# Altium PCB attenuator-pcb - 6.PcbDoc
Units mm, origin at the board's own origin, x right, y up, seen from the top; angles counter-clockwise.
Board outline 18 x 38.59 mm, 2 copper layers (Top Layer, Bottom Layer), stack 1.56 mm thick; 9 components, 37 nets, 24 pads, 30 vias.
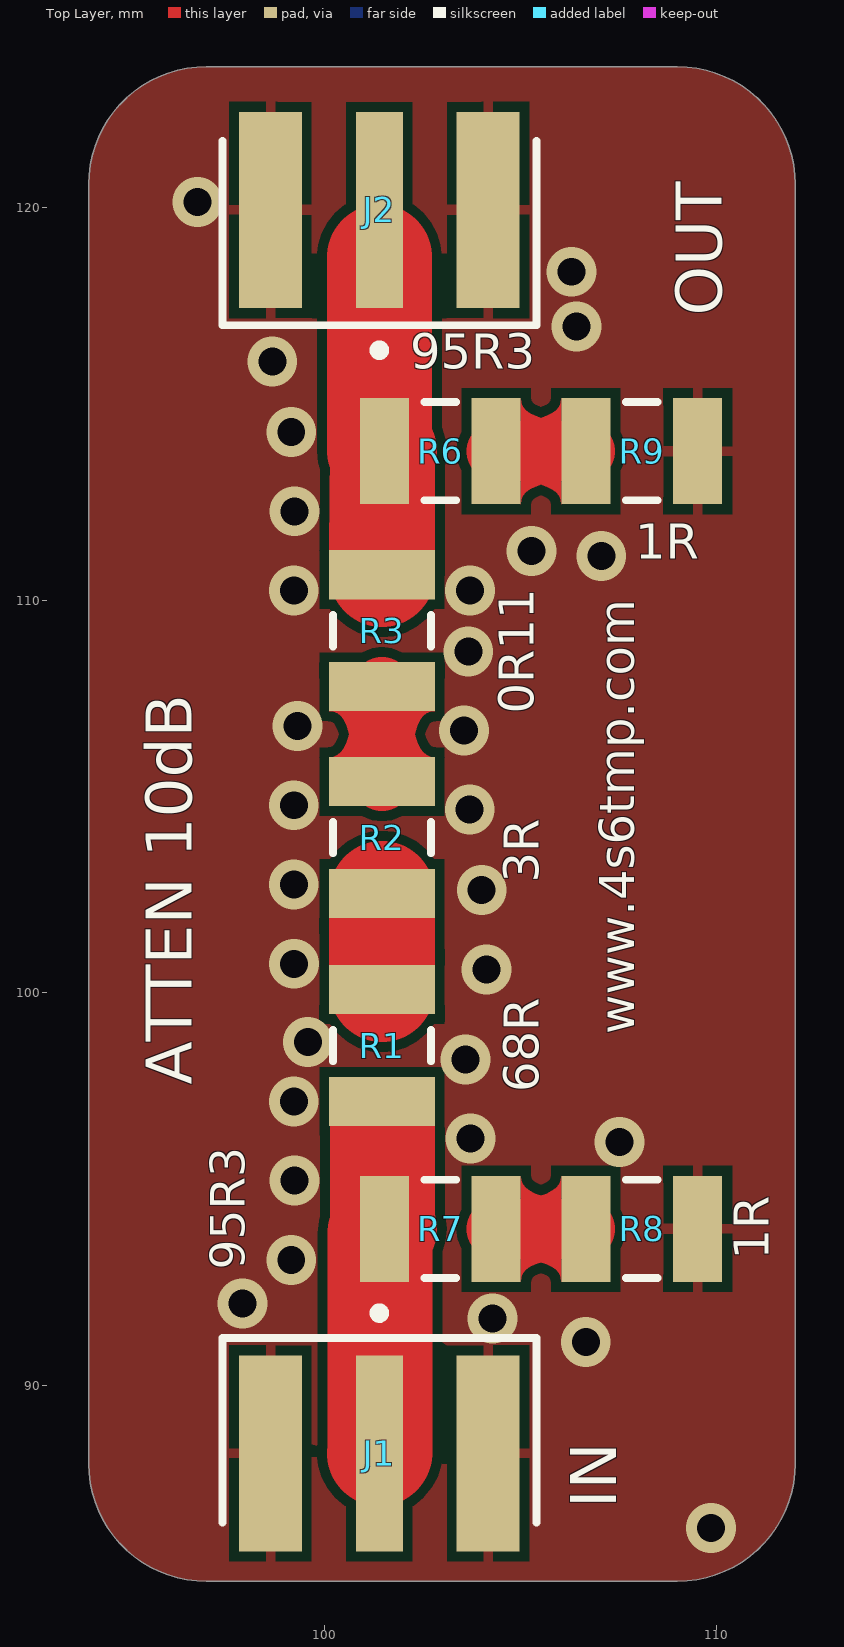
[diagram p0: Top Layer view]
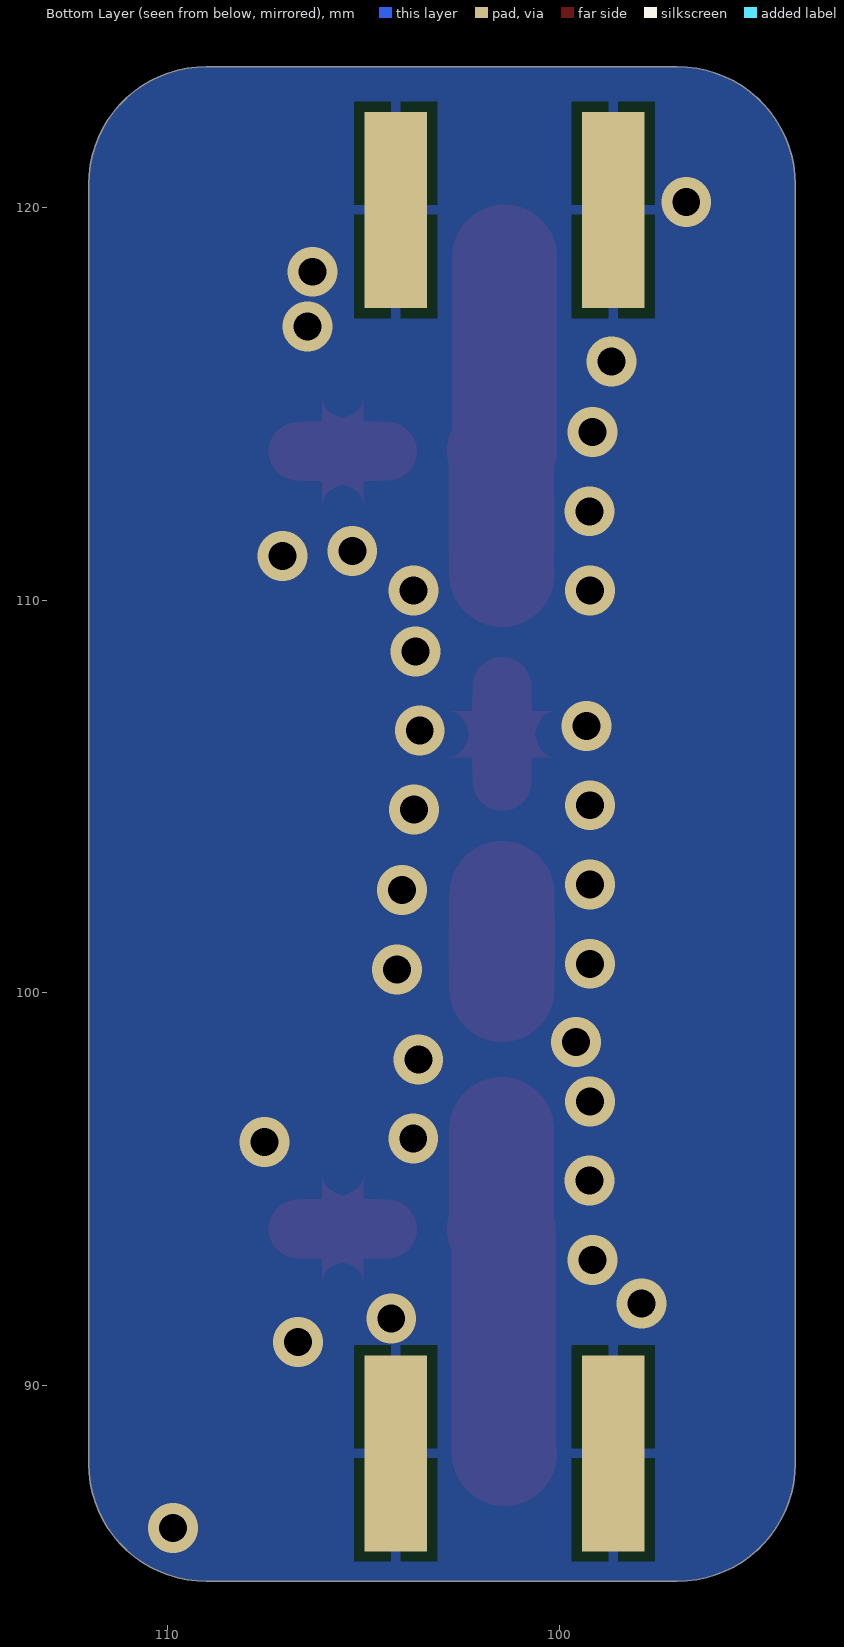
[diagram p1: Bottom Layer view, seen from below]

## Layer stack, top to bottom
Top Solder: solder mask 0.0203, Solder Resist, Dk 3.8
Top Layer: signal copper 0.035
Prepreg 7628: dielectric 1.49, FR-4, Dk 4.6
Bottom Layer: signal copper 0.035
Bottom Solder: solder mask 0.0203, Solder Resist, Dk 3.8

## Board outline
94,88 ccw(c97,88) 97,85 109,85 ccw(c109,88) 112,88 112,120.59 ccw(c109,120.59) 109,123.59 97,123.59 ccw(c97,120.59) 94,120.59

## Design rules (kind name [scope] priority, off if disabled: settings)
Clearance [All] p1: gap=0.254 ignorepadtopadclearanceinfootprint=FALSE except(0: Arc-Hole Track-Hole SMDPad-Hole THPad-Hole Via-Hole Fill-Hole Poly-Hole Region-Hole Text-Hole)
HoleToHoleClearance [All] p1: gap=0.1 allowstackedmicrovias=TRUE
MinimumSolderMaskSliver [All] p1 off: minsoldermaskwidth=0.1
PolygonConnect [All] p1: connectstyle=Relief reliefconductorwidth=0.254 reliefentries=4 polygonreliefangle="90 Angle" airgapwidth=0.254
RoomDefinition schematic [InComponentClass('schematic')] p1: confinementstyle=ConfineIn formatcopy=TRUE lockcomponents=FALSE outline 92.837,72.644 113.792,72.644 113.792,135.128 92.837,135.128
RoutingVias [All] p1: holewidth=0.711 width=1.27 viastyle="Through Hole" minholewidth=0.711 minwidth=1.27 maxholewidth=0.711 maxwidth=1.27
SolderMaskExpansion [All] p1: expansion=0.102 istentingtop=FALSE
Width [All] p1: maxlimit=3 minlimit=1.5 preferedwidth=2.673 substack1={BF15FDF8-BCB5-42EA-97F3-8AC8FC273260} impedanceprofiledriven=TRUE impedanceprofileid={88FF0C83-8680-40BB-AEE6-F79FA2882ED4} impedanceprofilevalue=50.000000 minimp=50.000000 maximp=50.000000 favimp=50.000000
Width Width_1 [All] p2: maxlimit=2 minlimit=0.254 preferedwidth=1 minimp=50.000000 maximp=50.000000 favimp=50.000000
28 further rules are at their usual default settings.

## Components (designator, comment, footprint, x,y, rotation, side; value= is the part's Value field where it differs from the comment)
J1 "IN" FP-CON-SMA-EDGE-S-MFG 101.405,81 r180 top
J2 "OUT" FP-CON-SMA-EDGE-S-MFG 101.405,127.2 r0 top
R1 "68R" RESC3225X70X50NL20T20 101.473,98.651 r90 top
R2 "3R" RESC3225X70X50NL20T20 101.473,103.95 r90 top
R3 "0R11" RESC3225X70X50NL20T20 101.473,109.22 r90 top
R6 "95R3" RESC3225X70X50NL20T20 102.957,113.792 r180 top
R7 "95R3" RESC3225X70X50NL20T20 102.957,93.98 r180 top
R8 "1R" RESC3225X70X50NL20T20 108.091,93.98 r180 top
R9 "1R" RESC3225X70X50NL20T20 108.091,113.792 r180 top

## Footprints (in the part's own frame and the unit in brackets; to place one, negate y for a bottom-side part, rotate by r counter-clockwise, add the part's x,y. Pads: shape width x height; smd on the part's side, far side on the other; paste and mask are expansions set on the pad)
FP-CON-SMA-EDGE-S-MFG [mm]
  rect 1.2x5 smd paste+0 mask+0: 1(0,-7.26)
  rect 1.6x5 smd paste+0 mask+0: 2(-2.77,-7.26) 3(2.77,-7.26)
  rect 1.6x5 smd far side paste+0 mask+0: 4(-2.77,-7.26) 5(2.77,-7.26)
  silkscreen extent -4,-10.96 4,-5.5, body extent -3.67,-9.86 3.67,4.86, height 0.25
RESC3225X70X50NL20T20 [mm] "Chip Resistor, 2-Leads, Body 3.20x2.50mm, IPC Medium Density"
  rect 1.25x2.7 smd: 1(-1.425,0) 2(1.425,0)
  silkscreen extent -0.4,-1.25 0.4,1.25, body extent -1.7,-1.35 1.7,1.35, height 0.7

## Part data
J1 J2: library part CMP-204357-000001-1, "CONN SMA JACK STR EDGE MNT", Frequency=18GHz, Manufacturer="RF Solutions Ltd.", Manufacturer Part Number=CON-SMA-EDGE-S, Package=CONN_JACK, Automotive=No, Category=Conn, ComponentLink2Description=Datasheet, ComponentLink2URL=https://www.rfsolutions.co.uk/downloads/1498648656DS-CON-EDGE-SMA-4.pdf, Conn Orientation="Right Angle", Contact Material=Gold, Device Class L1=Connectors, Device Class L2="RF / Coaxial Connectors", Device Class L3=unset, Digikey Description="CONN SMA JACK STR EDGE MNT", Footprint Url=https://forum.upverter.com/uploads/default/original/3X/b/e/be75b907af57498775929d6d9099689c472e0307.pdf, Height=6.35mm, Impedance=50Ω, Is Female=yes, Lead Free=Yes, Number Of Contacts=1, Octopart=https://octopart.com/con-sma-edge-s-rf+solutions-70967450, RoHS=TRUE, Shielding=true
R1 R2 R3 R6 R7 R8 R9: library part CMP-2005-01957-1, Manufacturer=Panasonic, Part Number=ERJ-14NF1001U

## Via types
v1: diameter 1.27, hole 0.711, Top Layer to Bottom Layer, 30 vias

## Nets (pads, with @x,y where several pads share a name; then routed paths per layer and width w, separated by ;. In a path a pad name is that pad's centre, name@x,y a point inside that pad or via, vN(x,y) a via of type N, cw(c..) or ccw(c..) an arc to the next point about the centre after c; other vN are vias at no path point)
GND: J1.2 J1.3 J1.4 J1.5 J2.2 J2.3 J2.4 J2.5 R8.1 R9.1
  other v1: 109.855,86.36 106.666,91.094 104.29,91.696 97.917,92.075 99.161,93.191 99.242,95.209 107.523,96.196 103.731,96.279 99.226,97.229 103.601,98.295 99.584,98.744 104.14,100.584 99.228,100.733 104.013,102.616 99.226,102.753 103.708,104.661 99.226,104.773 103.564,106.675 99.318,106.791 103.672,108.693 99.226,110.242 103.72,110.245 107.061,111.125 105.283,111.252 99.242,112.262 99.161,114.28 98.679,116.078 106.426,116.967 106.299,118.364 96.774,120.142
NetJ1_1: J1.1 R1.1 R7.2 | length 8.3
  Top Layer w2.673: J1.1 101.425,88.279 101.425,93.873 R7.2 ; 101.487,96.515 101.487,93.994 R7.2@101.5,93.98
NetJ2_1: J2.1 R3.2 R6.2 | length 8.2
  Top Layer w2.673: J2.1@101.405,118.74 101.405,113.806 101.419,113.792 R6.2@101.5,113.792 ; R3.2 101.487,110.658 101.487,113.778 R6.2@101.5,113.792 ; R6.2 R6.2@101.5,113.792
NetJ3_1: 
NetJ4_1: 
NetJ5_1: 
NetJ6_1: 
NetJ7_1: 
NetJ8_1: 
NetJ9_1: 
NetJ10_1: 
NetJ11_1: 
NetJ12_1: 
NetR1_2: R1.2 R2.1 | length 2.4
  Top Layer w2.673: R1.2 R2.1
NetR2_2: R2.2 R3.1 | length 2.4
  Top Layer w1.5: R2.2 R3.1
NetR4_2: 
NetR6_1: R6.1 R9.2 | length 2.3
  Top Layer w1.5: R6.1 R9.2
NetR7_1: R7.1 R8.2 | length 2.3
  Top Layer w1.5: R7.1 R8.2
NetR12_2: 
NetR13_2: 
NetR15_2: 
NetR17_2: 
NetR18_2: 
NetR20_1: 
NetR21_1: 
NetR22_1: 
NetR23_1: 
NetR24_1: 
NetR25_1: 
NetR30_2: 
NetR32_2: 
NetR34_1: 
NetR35_1: 
NetR36_1: 
NetR37_1: 
NetR38_1: 
NetR39_1: 

## Polygon pours and split planes (outlines as drawn)
GND on Top Layer "Bottom Layer-GND1" (solid, pour order 31): 94,88 ccw(c97,88) 97,85 109,85 ccw(c109,88) 112,88 112,120.59 ccw(c109,120.59) 109,123.59 97,123.59 ccw(c97,120.59) 94,120.59
GND on Top Layer "Top Layer-GND 5" (solid, pour order 25): 107.591,116.649 107.879,116.562 108.145,116.42 108.378,116.228 108.569,115.996 108.711,115.73 108.798,115.442 108.828,115.142 108.828,114.539 108.831,114.528 108.852,114.482 108.875,114.384 108.904,114.288 108.909,114.237 108.92,114.188 108.946,113.993 108.948,113.942 108.956,113.892 108.952,113.792 108.956,113.692 108.948,113.642 108.946,113.591 108.92,113.396 108.909,113.347 108.904,113.296 108.875,113.2 108.852,113.102 108.831,113.056 108.828,113.045 108.828,112.442 108.798,112.142 108.711,111.854 108.569,111.588 108.378,111.356 108.145,111.164 107.879,111.022 107.591,110.935 107.291,110.906 106.041,110.906 105.969,110.913 105.945,110.912 105.896,110.92 105.741,110.935 105.668,110.957 105.647,110.961 105.608,110.976 105.524,111.001 105.44,110.976 105.401,110.961 105.38,110.957 105.307,110.935 105.153,110.92 105.104,110.912 105.079,110.913 105.007,110.906 103.757,110.906 103.457,110.935 103.169,111.022 102.903,111.164 102.671,111.356 102.48,111.588 102.338,111.854 102.25,112.142 102.221,112.442 102.221,113.045 102.217,113.056 102.196,113.102 102.174,113.2 102.144,113.296 102.14,113.347 102.128,113.396 102.102,113.591 102.101,113.642 102.092,113.692 102.096,113.792 102.092,113.892 102.101,113.942 102.102,113.993 102.128,114.188 102.14,114.237 102.144,114.288 102.174,114.384 102.196,114.482 102.217,114.528 102.221,114.539 102.221,115.142 102.25,115.442 102.338,115.73 102.48,115.996 102.671,116.228 102.903,116.42 103.169,116.562 103.457,116.649 103.757,116.678 105.007,116.678 105.079,116.671 105.104,116.672 105.153,116.664 105.307,116.649 105.38,116.627 105.401,116.623 105.44,116.608 105.524,116.583 105.608,116.608 105.647,116.623 105.668,116.627 105.741,116.649 105.896,116.664 105.945,116.672 105.969,116.671 106.041,116.678 107.291,116.678
GND on Top Layer "Top Layer-GND 6" (solid, pour order 24): 107.591,96.837 107.879,96.75 108.145,96.608 108.378,96.416 108.569,96.184 108.711,95.918 108.798,95.63 108.828,95.33 108.828,92.63 108.798,92.33 108.711,92.042 108.569,91.776 108.378,91.544 108.145,91.352 107.879,91.21 107.591,91.123 107.291,91.094 106.041,91.094 105.741,91.123 105.524,91.189 105.307,91.123 105.007,91.094 103.757,91.094 103.457,91.123 103.169,91.21 102.903,91.352 102.671,91.544 102.48,91.776 102.338,92.042 102.25,92.33 102.221,92.63 102.221,95.33 102.25,95.63 102.338,95.918 102.48,96.184 102.671,96.416 102.903,96.608 103.169,96.75 103.457,96.837 103.757,96.866 105.007,96.866 105.307,96.837 105.524,96.771 105.741,96.837 106.041,96.866 107.291,96.866
GND on Top Layer "Top Layer-GND 7" (solid, pour order 23): 101.623,110.076 101.674,110.075 101.869,110.049 101.918,110.038 101.969,110.033 102.065,110.003 102.163,109.981 102.209,109.96 102.22,109.956 102.823,109.956 103.123,109.927 103.411,109.84 103.677,109.698 103.909,109.506 104.101,109.274 104.243,109.008 104.33,108.72 104.359,108.42 104.359,107.17 104.33,106.87 104.243,106.585 104.33,106.299 104.359,105.999 104.359,104.749 104.33,104.45 104.243,104.162 104.129,103.95 104.243,103.737 104.33,103.449 104.359,103.149 104.359,101.899 104.358,101.88 104.358,100.721 104.359,100.701 104.359,99.451 104.33,99.151 104.243,98.863 104.101,98.597 103.909,98.365 103.677,98.173 103.596,98.131 103.581,98.11 103.508,98.041 103.439,97.968 103.398,97.938 103.362,97.904 103.082,97.69 103.04,97.663 103.001,97.631 102.912,97.584 102.827,97.531 102.779,97.513 102.735,97.489 102.41,97.354 102.362,97.34 102.316,97.319 102.218,97.296 102.122,97.267 102.072,97.262 102.022,97.251 101.674,97.205 101.623,97.203 101.573,97.195 101.473,97.198 101.373,97.195 101.323,97.203 101.272,97.205 100.924,97.251 100.874,97.262 100.824,97.267 100.728,97.296 100.63,97.319 100.584,97.34 100.536,97.354 100.211,97.489 100.167,97.513 100.119,97.531 100.034,97.584 99.945,97.631 99.906,97.663 99.864,97.69 99.584,97.904 99.548,97.938 99.507,97.968 99.438,98.041 99.365,98.11 99.35,98.131 99.269,98.173 99.037,98.365 98.845,98.597 98.703,98.863 98.616,99.151 98.587,99.451 98.587,100.701 98.588,100.721 98.588,101.88 98.587,101.899 98.587,103.149 98.616,103.449 98.703,103.737 98.817,103.95 98.703,104.162 98.616,104.45 98.587,104.749 98.587,105.999 98.616,106.299 98.703,106.585 98.616,106.87 98.587,107.17 98.587,108.42 98.616,108.72 98.703,109.008 98.845,109.274 99.037,109.506 99.269,109.698 99.535,109.84 99.823,109.927 100.123,109.956 100.726,109.956 100.737,109.96 100.783,109.981 100.881,110.003 100.977,110.033 101.028,110.038 101.077,110.049 101.272,110.075 101.323,110.076 101.373,110.085 101.473,110.081 101.573,110.085
GND on Top Layer "Top Layer-GND 8" (solid, pour order 22): 160 vertices, not listed, extent 98.521,85.407 108.956,99.396
GND on Top Layer "Top Layer-GND 9" (solid, pour order 21): 202 vertices, not listed, extent 98.521,107.764 108.956,123.211
GND on Bottom Layer "Top Layer-No Net" (solid, pour order 30): 94,88 ccw(c97,88) 97,85 109,85 ccw(c109,88) 112,88 112,120.59 ccw(c109,120.59) 109,123.59 97,123.59 ccw(c97,120.59) 94,120.59

## Silkscreen, mask and mechanical layers (free items; w line width, h text height)
Top Overlay:
  text "www.4s6tmp.com" at 108.187,98.933 h1.52 r90
  text "ATTEN 10dB" at 97.014,97.655 h2 r90
Mechanical 1:
  the board outline again, w0.254